# Altium PCB Reflectance (Single).PcbDoc
Units mm, origin at the board's own origin, x right, y up, seen from the top; angles counter-clockwise.
Board outline 50 x 40 mm, 2 copper layers (Top Layer, Bottom Layer); 7 components, 124 nets, 29 pads, 0 vias.
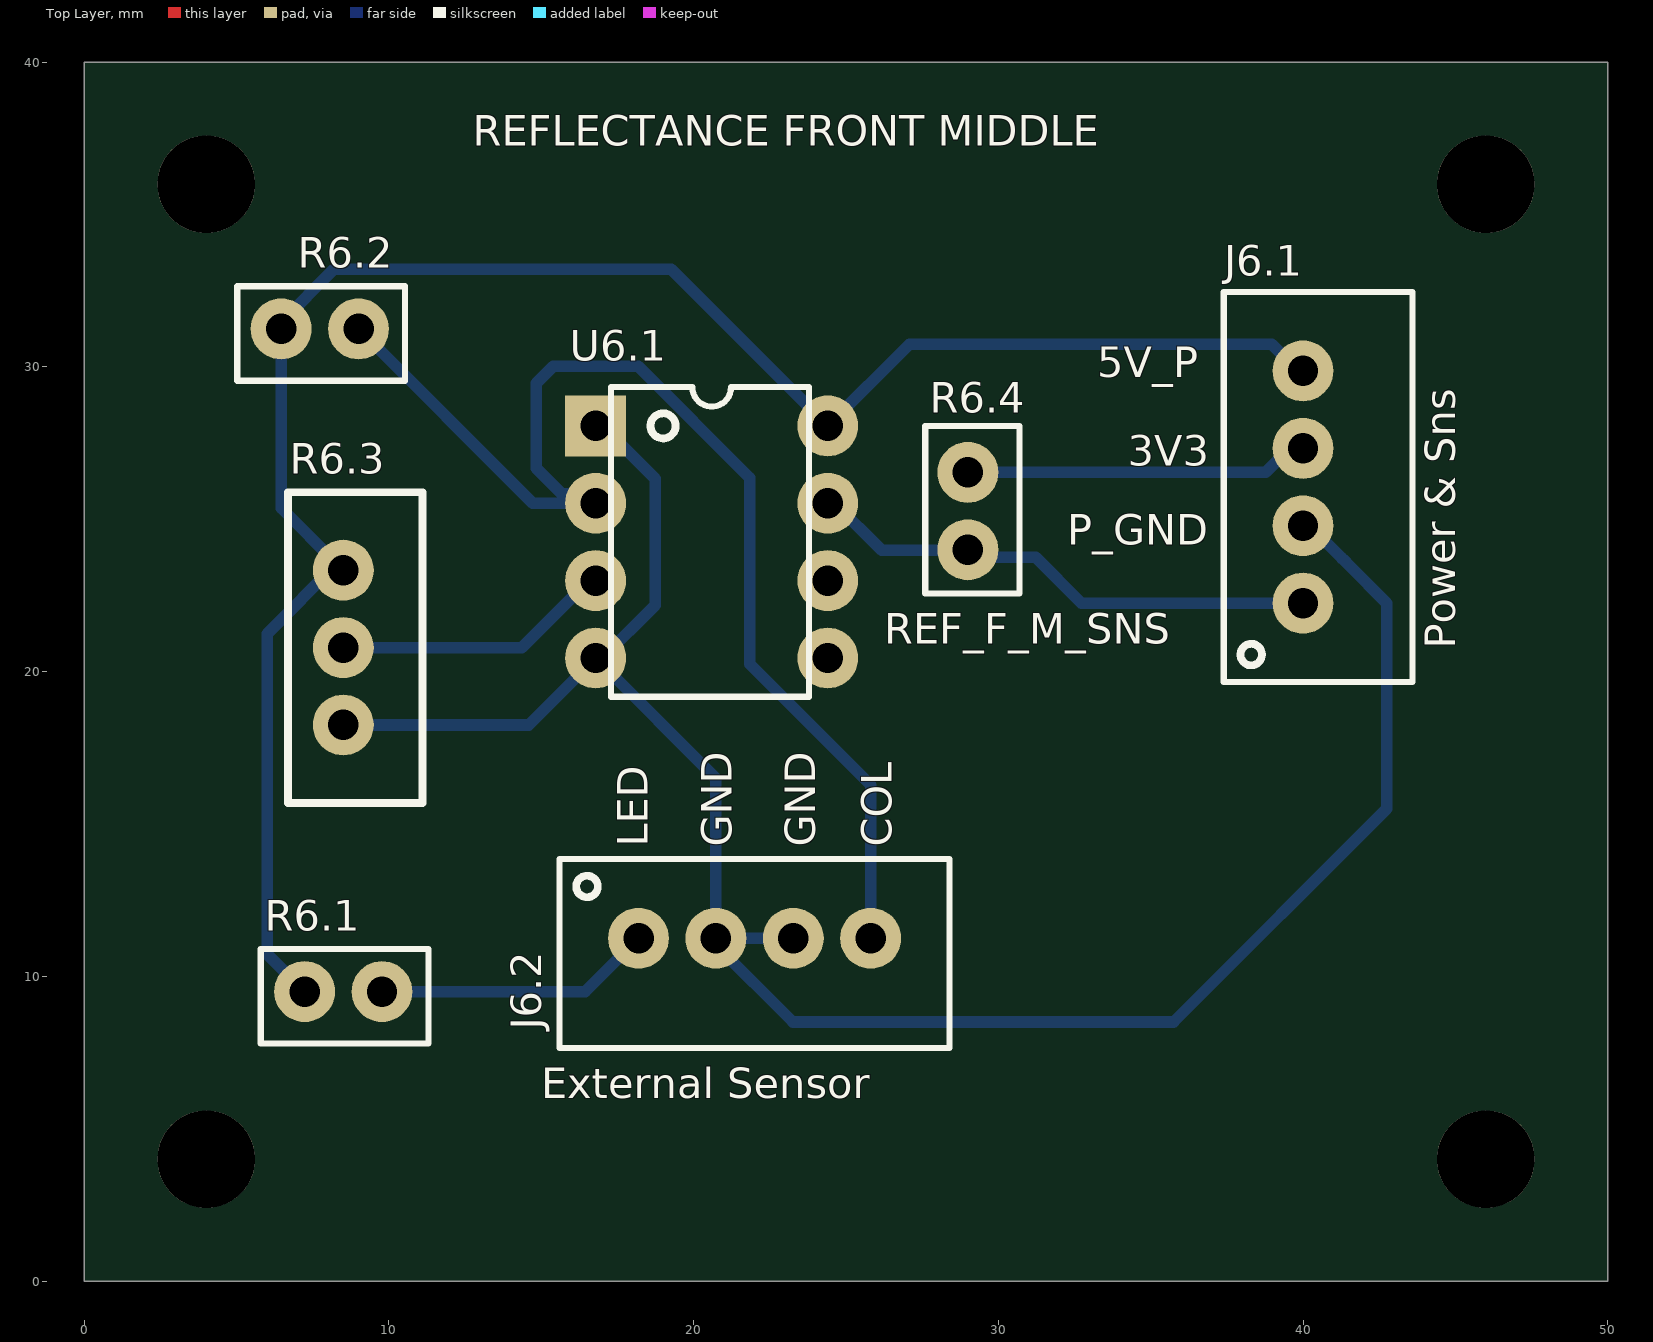
[diagram p0: Top Layer view]
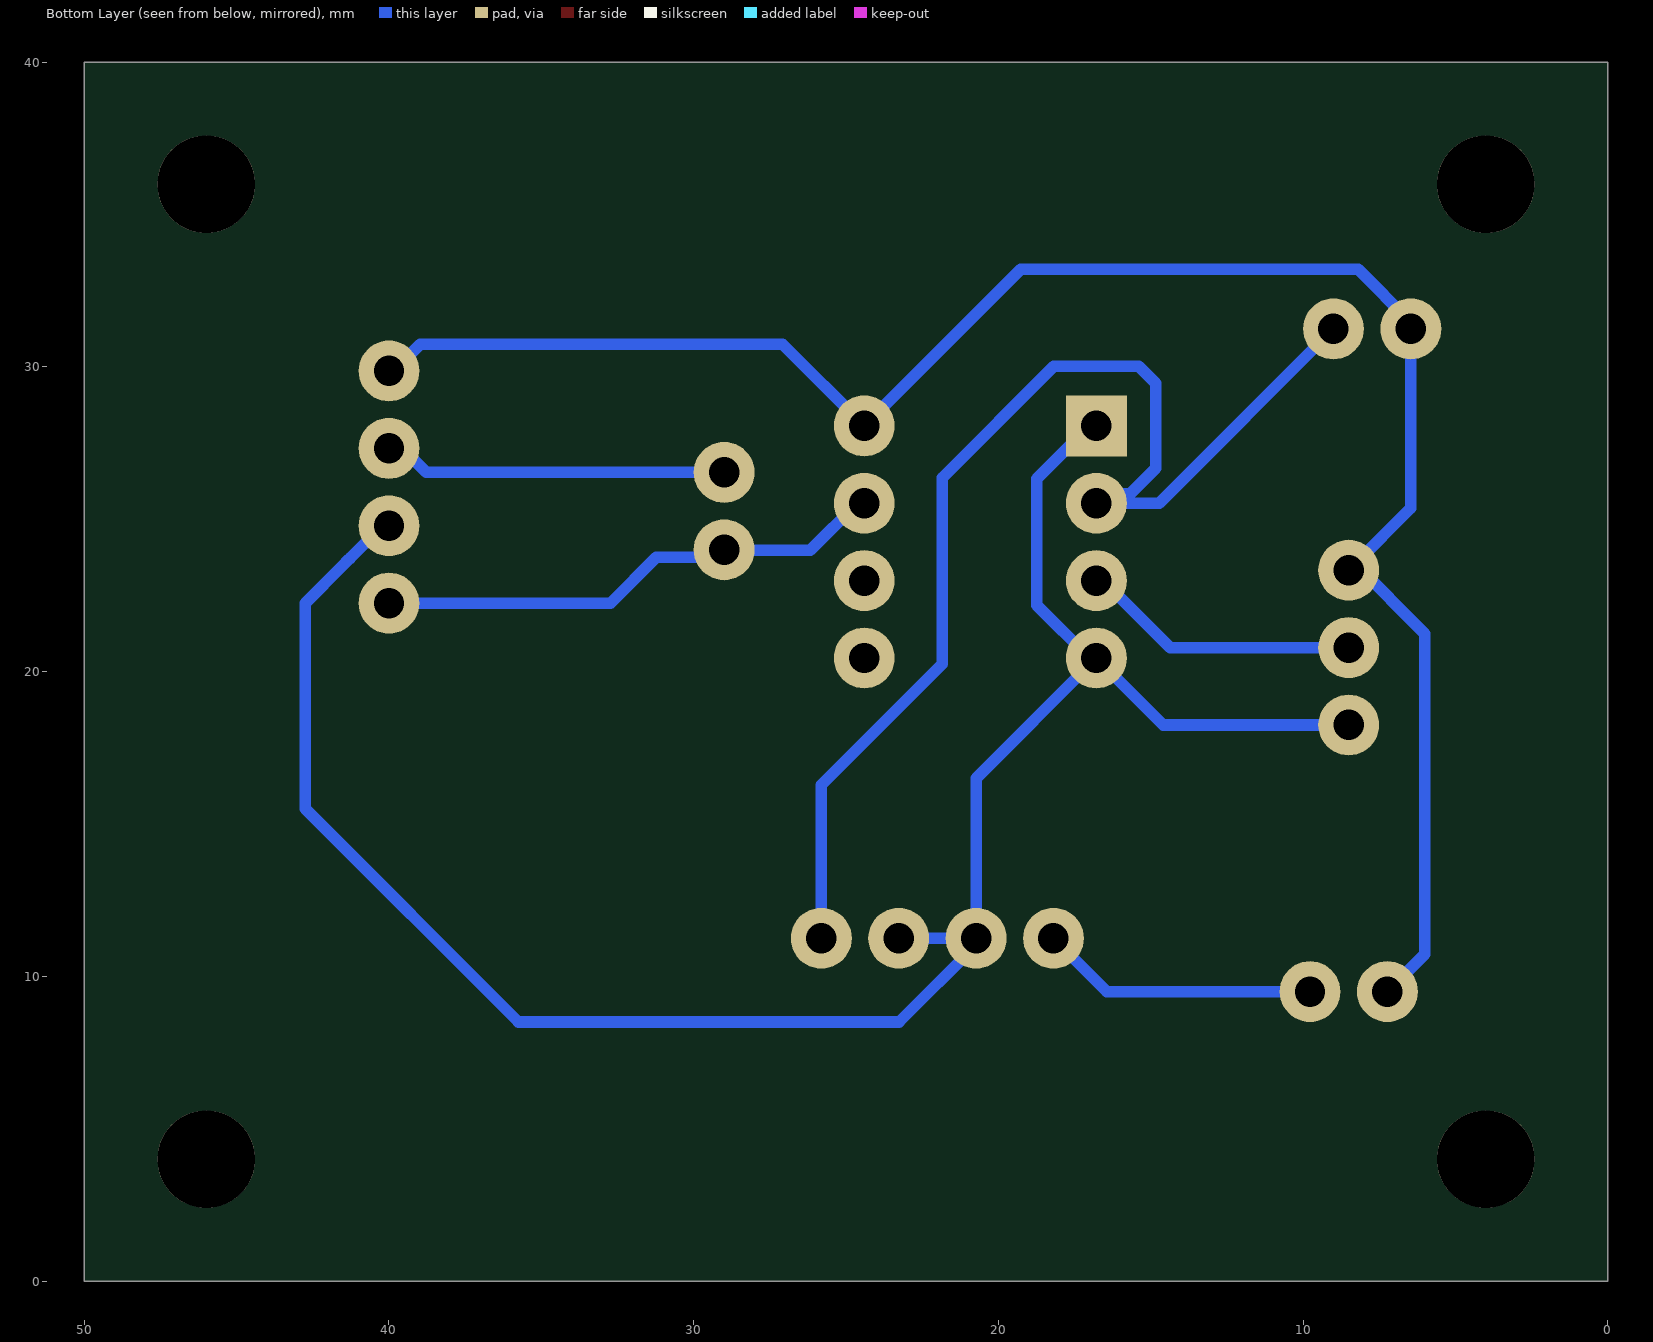
[diagram p1: Bottom Layer view, seen from below]
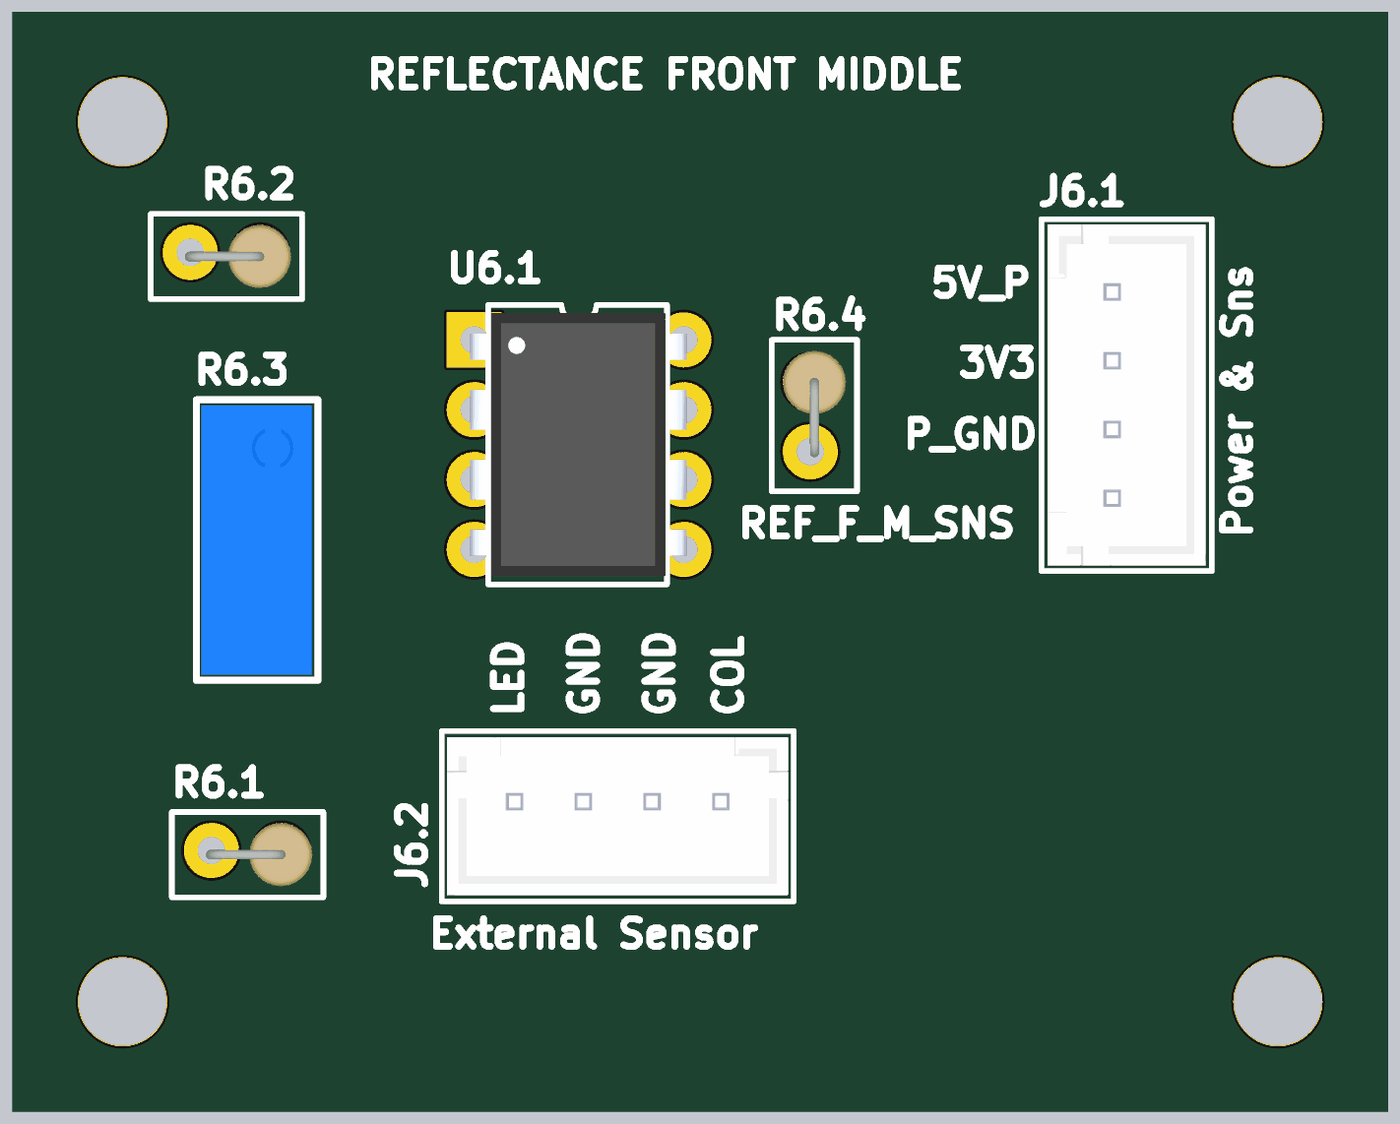
[diagram p2: 3D render of the assembled board from above, using the file's embedded part models]

## Layer stack, top to bottom
Top Solder: solder mask 0.0102, Solder Resist, Dk 3.5
Top Layer: signal copper 0.0356
Dielectric 1: dielectric 0.32, FR-4, Dk 4.8
Bottom Layer: signal copper 0.0356
Bottom Solder: solder mask 0.0102, Solder Resist, Dk 3.5

## Board outline
0,0 50,0 50,40 0,40

## Design rules (kind name [scope] priority, off if disabled: settings)
BoardOutlineClearance [All] p1: gap=0.3 ignorepadtopadclearanceinfootprint=FALSE
Clearance [All] p1: gap=0.762 ignorepadtopadclearanceinfootprint=FALSE
HoleSize [All] p1: absolutevalues=TRUE maxlimit=100 minlimit=0.4 maxpercent=80.000 minpercent=20.000
PolygonConnect [All] p1: connectstyle=Relief reliefconductorwidth=0.254 reliefentries=4 polygonreliefangle="90 Angle" airgapwidth=0.254
RoutingLayers [All] p1: top layer_v5=FALSE bottom layer_v5=TRUE
RoutingVias [All] p1: holewidth=0.711 width=1.27 viastyle="Through Hole" minholewidth=0.711 minwidth=1.27 maxholewidth=0.711 maxwidth=1.27
SolderMaskExpansion [All] p1: expansion=0.102 istentingtop=FALSE
UnRoutedNet [All] p1: checkbadconnections=TRUE
Width [All] p1: maxlimit=10 minlimit=0.381 preferedwidth=0.381
27 further rules are at their usual default settings.

## Components (designator, comment, footprint, x,y, rotation, side; value= is the part's Value field where it differs from the comment)
J6.1 "Bluepill Board Connector" "4Pos JST" 40,26.06 r90 top
J6.2 "Sensor Connections" "4Pos JST" 22,11.25 r0 top
R6.1 "100" Res_Generic 8.5,9.5 r0 top
R6.2 "47k" Res_Generic 7.73,31.25 r0 top
R6.3 "10k" "Pot Generic" 8.5,20.79 r90 top
R6.4 "10k" Res_Generic 29,25.27 r90 top
U6.1 "LM311" DIP8 20.592,24.258 r0 top

## Footprints (in the part's own frame and the unit in brackets; to place one, negate y for a bottom-side part, rotate by r counter-clockwise, add the part's x,y. Pads: shape width x height; smd on the part's side, far side on the other; paste and mask are expansions set on the pad)
"4Pos JST" [mm]
  round 2 hole 1: 1(-3.81,0) 2(-1.27,0) 3(1.27,0) 4(3.81,0)
  silkscreen extent -6.4,-3.6 6.4,2.6, body extent -6.2,-3.38 6.2,2.37, height 7.01
DIP8 [mm]
  rect 2x2 hole 1: 1(-3.81,3.81)
  round 2 hole 1: 2(-3.81,1.27) 3(-3.81,-1.27) 4(-3.81,-3.81) 5(3.81,-3.81) 6(3.81,-1.27) 7(3.81,1.27) 8(3.81,3.81)
  silkscreen extent -3.3,-5.08 3.2,5.08, body extent -3.96,-4.79 3.91,4.79, height 5.33
"Pot Generic" [mm]
  round 2 hole 1: 1(-2.54,0) 2(0,0) 3(2.54,0)
  silkscreen extent -5.1,-2.6 5.1,1.82, body extent -4.89,-2.38 4.89,1.63, height 12.91
Res_Generic [mm] "Cap Generic THT Footprint"
  round 2 hole 1: 1(-1.27,0) 2(1.27,0)
  silkscreen extent -2.71,-1.7 2.8,1.4, body extent -1.47,-1.3 2.4,1, height 8.18

## Part data
J6.1 J6.2: library part "4pos Conn", "4pos Conn"
R6.1 R6.2 R6.4: library part Res_Generic
R6.3: library part Pot_Generic
U6.1: library part "LM311 Comparator", "LM311 IC DIFF COMPARATOR STROBE 8-DIP", Supplier Part Number 1=595-LM311P, Supplier 1=Mouser

## Free pads (board coordinates)
  round 3.2 hole 3.2: ""(4,4) ""(4,36) ""(46,4) ""(46,36)

## Nets (pads, with @x,y where several pads share a name; then routed paths per layer and width w, separated by ;. In a path a pad name is that pad's centre, name@x,y a point inside that pad or via, vN(x,y) a via of type N, cw(c..) or ccw(c..) an arc to the next point about the centre after c; other vN are vias at no path point)
2.5V_GND: 
3.3V_P: J6.1.3 R6.4.2 | length 11.3
  Bottom Layer w0.381: R6.4.2 38.772,26.54 39.562,27.33 J6.1.3
5V_ARM: 
5V_P: J6.1.4 R6.1.1 R6.2.1 R6.3.3 U6.1.8 | length 62.3
  Bottom Layer w0.381: R6.1.1 6,10.73 6,21.25 R6.3.3@8.29,23.54 ; R6.3.3 R6.3.3@8.29,23.54 ; J6.1.4 39.853,29.87 38.973,30.75 27.084,30.75 U6.1.8 19.267,33.203 8.191,33.203 6.46,31.471 6.46,25.37 R6.3.3@8.29,23.54
5V_SERVO: 
8V: 
15V: 
ARM_SERV_BP_OUT: 
ARM_SERV_PWM: 
BOX_SERV_BP_OUT: 
BOX_SERV_PWM: 
BRIDGE_SERV_BP_OUT: 
BRIDGE_SERV_PWM: 
CLAW_SERV_BP_OUT: 
CLAW_SERV_PWM: 
DCLK: 
DIO: 
ECHO_F_M: 
ECHO_S_L: 
ECHO_S_R: 
ECHO_SPARE: 
ENCODER_L_I: 
ENCODER_L_Q: 
ENCODER_R_I: 
ENCODER_R_Q: 
IR_LEFT_TRANS: 
IR_RIGHT_TRANS: 
IR_SNS_LEFT: 
IR_SNS_RIGHT: 
LEFT+: 
LEFT-: 
LEFT_FWD: 
LEFT_FWD_BP_OUT: 
LEFT_REV: 
LEFT_REV_BP_OUT: 
M_GND: 
MAGNET_SNS: 
NetC1.8_2: 
NetC5.1_1: 
NetC5.1_2: 
NetC5.2_1: 
NetC5.2_2: 
NetC5.3_1: 
NetC5.4_1: 
NetQ2.1_2: 
NetQ2.1_3: 
NetQ2.2_2: 
NetQ2.2_3: 
NetQ2.3_2: 
NetQ2.3_3: 
NetQ2.4_2: 
NetQ2.4_3: 
NetQ3.1_2: 
NetQ3.1_3: 
NetQ3.2_2: 
NetQ3.2_3: 
NetQ3.3_2: 
NetQ3.3_3: 
NetQ3.4_2: 
NetQ3.4_3: 
NetQ3.5_1: 
NetQ3.6_1: 
NetQ3.7_1: 
NetQ3.8_1: 
NetR2.3_2: 
NetR2.6_2: 
NetR2.7_1: 
NetR2.8_1: 
NetR2.13_2: 
NetR2.14_2: 
NetR2.15_2: 
NetR2.16_2: 
NetR3.3_2: 
NetR3.4_1: 
NetR3.5_1: 
NetR3.6_2: 
NetR3.11_2: 
NetR3.12_2: 
NetR3.13_1: 
NetR3.14_2: 
NetR4.11_2: 
NetR4.13_2: 
NetR4.15_2: 
NetR4.17_2: 
NetR4.19_2: 
NetR5.2_1: 
NetR5.4_2: 
NetR5.7_1: 
NetR5.9_2: 
NetR5.15_1: 
NetR6.3_2: R6.3.2 U6.1.3 | length 9.2
  Bottom Layer w0.381: R6.3.2 14.363,20.79 16.561,22.988 U6.1.3
P_GND: J6.1.2 J6.2.2 J6.2.3 R6.3.1 U6.1.1 U6.1.4 | length 68.8
  Bottom Layer w0.381: R6.3.1 14.584,18.25 U6.1.4 ; U6.1.1 17.003,28.068 18.734,26.337 18.734,22.179 17.003,20.448 U6.1.4 ; J6.2.3 J6.2.2 ; J6.1.2 40.21,24.79 41.25,23.75 cw(c40,22.25) 41.5,23.5 42.75,22.25 42.75,15.5 35.75,8.5 23.259,8.5 20.73,11.029 J6.2.2 ; U6.1.4 16.893,20.337 20.73,16.5 J6.2.2
REF_F_L_COL: 
REF_F_L_LED: 
REF_F_L_SNS: 
REF_F_M_COL: J6.2.4 R6.2.2 U6.1.2 | length 40.9
  Bottom Layer w0.381: R6.2.2 14.722,25.528 U6.1.2 16.472,25.838 15.665,25.838 14.829,26.673 14.829,29.463 15.387,30.021 18.177,30.021 21.838,26.359 21.838,20.25 25.81,16.279 J6.2.4
REF_F_M_LED: J6.2.1 R6.1.2 | length 9.1
  Bottom Layer w0.381: R6.1.2 16.44,9.5 J6.2.1
REF_F_M_SNS: J6.1.1 R6.4.1 U6.1.7 | length 17
  Bottom Layer w0.381: U6.1.7 24.623,25.528 26.171,23.98 R6.4.1@29,23.98 ; R6.4.1 29.25,23.75 31.23,23.75 32.73,22.25 J6.1.1
REF_F_R_COL: 
REF_F_R_LED: 
REF_F_R_SNS: 
REF_R_COL: 
REF_R_LED: 
REF_R_SNS: 
REF_S_L_COL: 
REF_S_L_LED: 
REF_S_L_SNS: 
REF_S_R_COL: 
REF_S_R_LED: 
REF_S_R_SNS: 
RIGHT+: 
RIGHT-: 
RIGHT_FWD: 
RIGHT_FWD_BP_OUT: 
RIGHT_REV: 
RIGHT_REV_BP_OUT: 
SPARE_1: 
SW_CLAW+: 
SW_CLAW_SNS: 
SW_FRONT+: 
SW_FRONT_SNS: 
SW_REAR+: 
SW_REAR_SNS: 
TRIG_COM: 
pads on no net: U6.1.5 U6.1.6

## Silkscreen, mask and mechanical layers (free items; w line width, h text height)
Top Overlay:
  text "REFLECTANCE FRONT MIDDLE" at 12.754,37.254 h1
  text "5V_P" at 33.254,29.671 h1
  text "3V3" at 34.254,26.754 h1
  text "P_GND" at 32.254,24.171 h1
  text "REF_F_M_SNS" at 26.254,20.921 h1
  text "Power & Sns" at 44.996,20.754 h1 r90
  text "LED" at 18.496,14.254 h1 r90
  text "GND" at 21.246,14.254 h1 r90
  text "GND" at 23.996,14.254 h1 r90
  text "COL" at 26.496,14.254 h1 r90
  text "External Sensor" at 15.004,6.004 h1
Mechanical 1:
  the board outline again, w0.2